# EAGLE board charger (EAGLE 9.6.1)
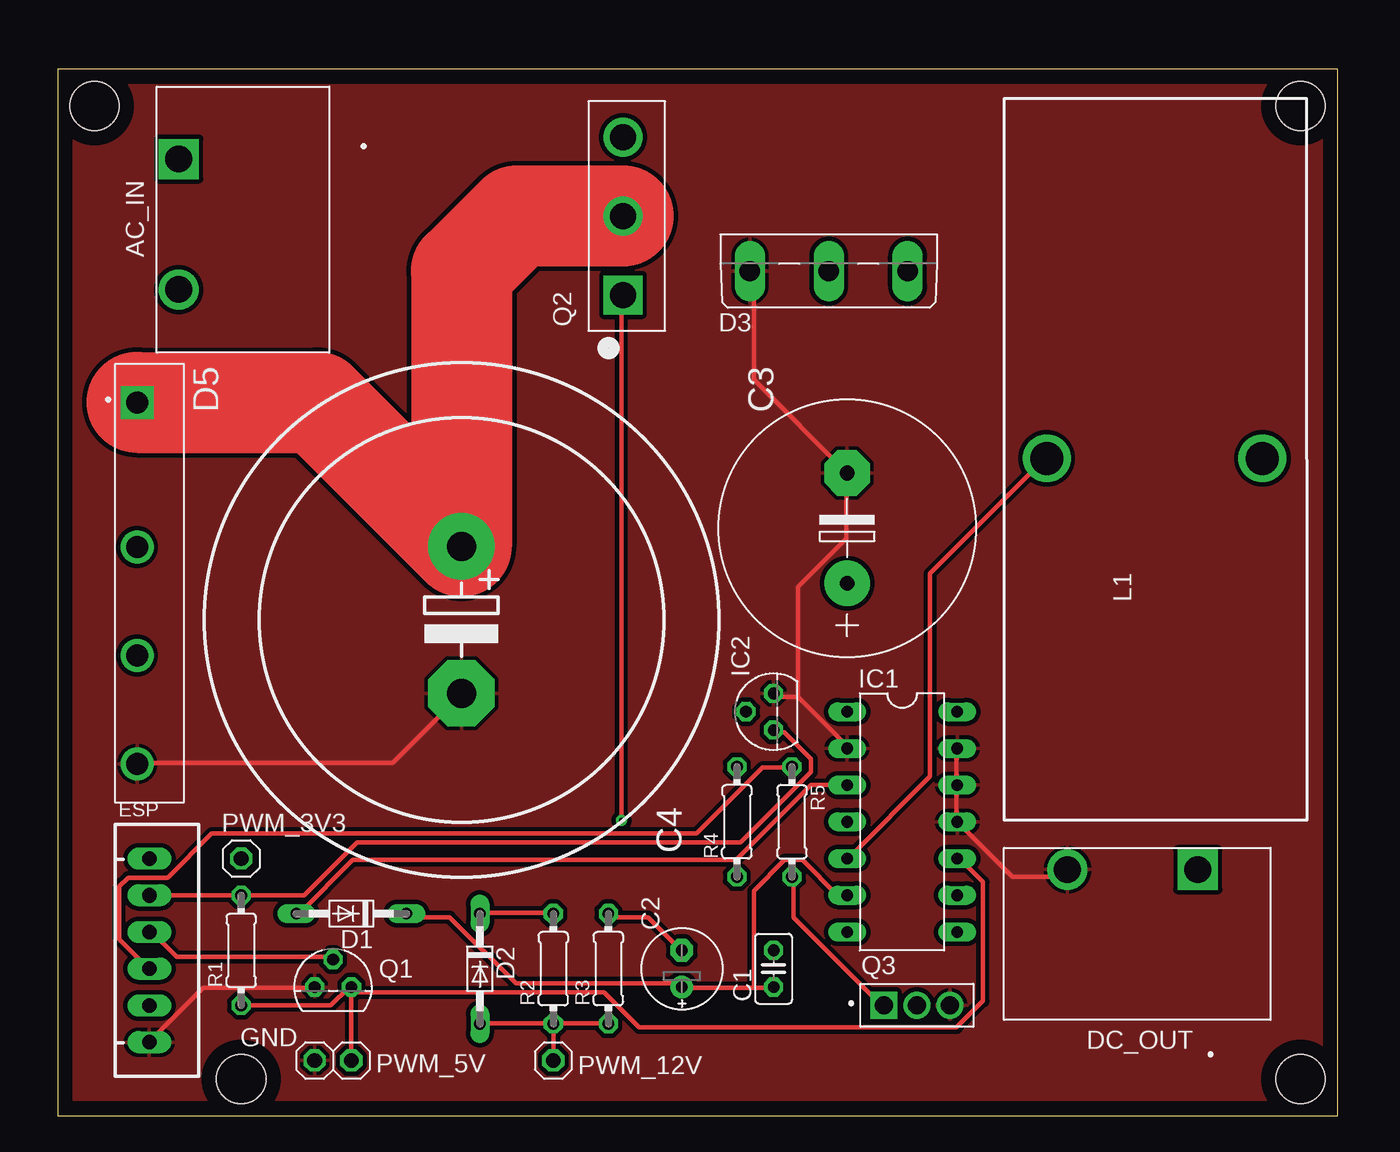
[diagram p0: board, top side]
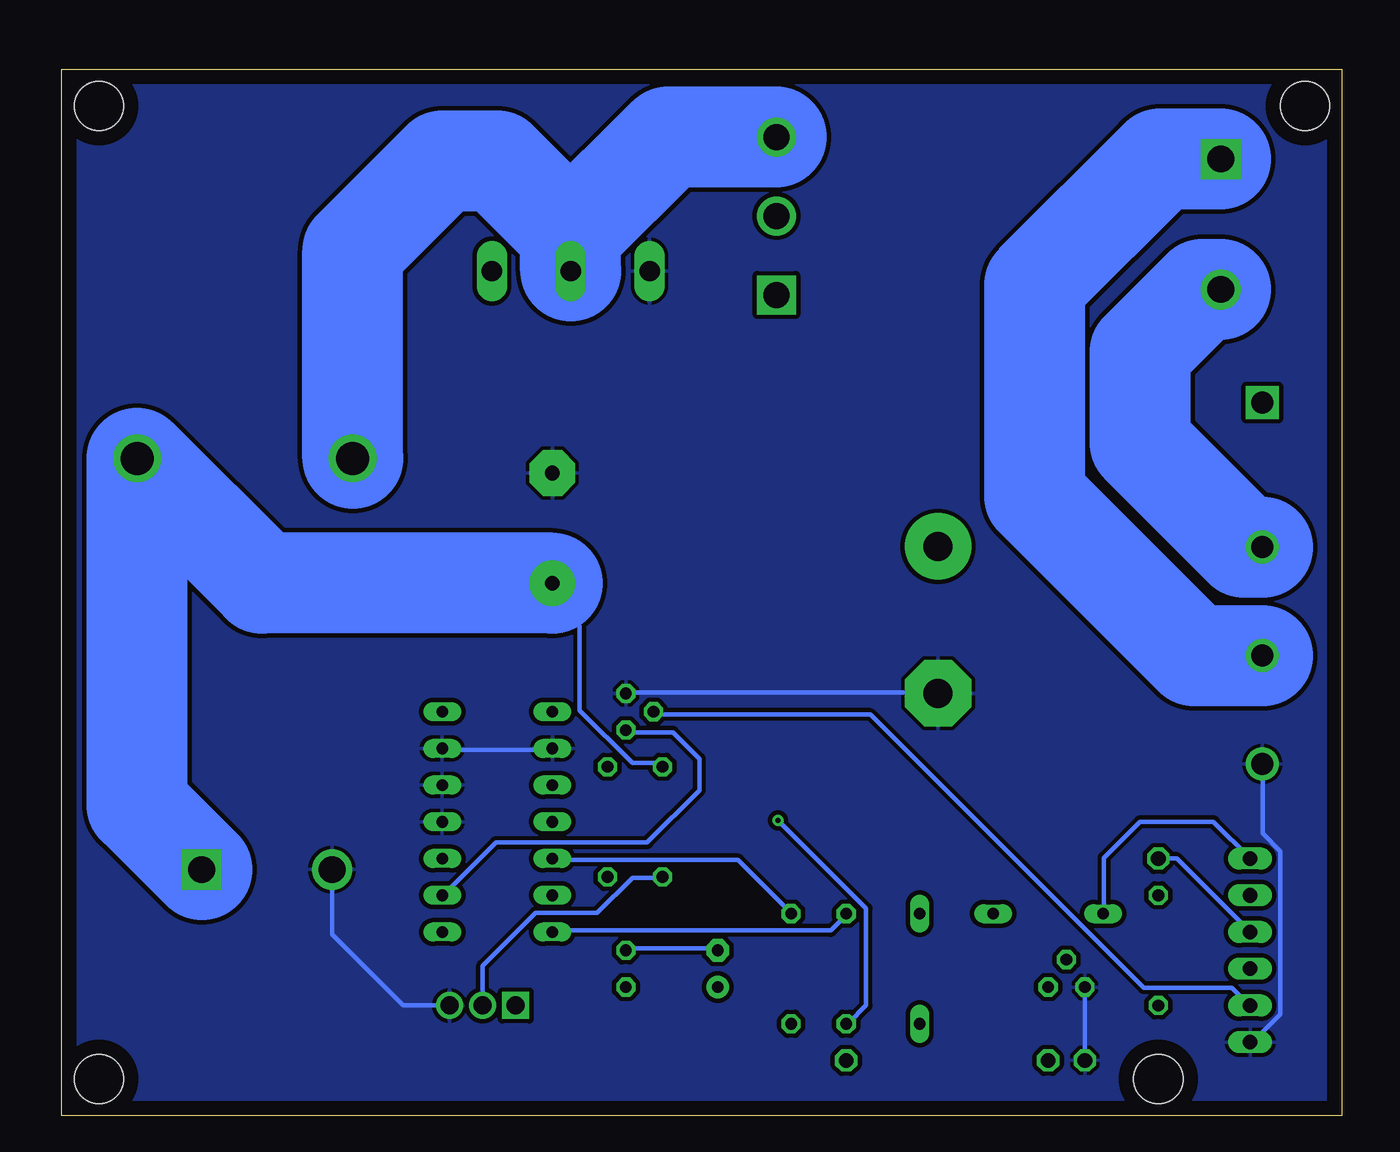
[diagram p1: board, bottom side, seen from below]

Size 88.57 x 72.38 mm. Coordinates in mm from the lower left corner, seen from the top.
Outline: 0,0 88.57,0 88.57,72.38 0,72.38 0,0
Copper layers (1*16): Top 0.035mm / dielectric 1.5mm / Bottom 0.035mm
Design rules "default *": minimum track width 12mil, minimum drill 0.35mm, track to track 12mil, track to pad 12mil, pad to pad 12mil, via to via 12mil, smd to smd 12mil, copper to edge 40mil, drill to drill 6mil, minimum pad ring 10mil, minimum via ring 8mil, stop-mask expansion 4mil, vias tented up to drill 0mil, thermal gap 10mil
Holes 3.4 mm at 2.54,69.85 85.98,69.85 12.7,2.54 85.98,2.54

## Footprints (pad centres in the part's own frame; a part is rotated, then mirrored left to right if it is on the bottom)
TE_1977477-2 = drill 1.85 square: 1 -3.241,-5.334 | drill 1.85: 2 5.781,-5.334
C025-025X050 = drill 0.813 octagon: 1 -1.27,0; 2 1.27,0
E2,5-6E = drill 0.813 pad 1.575: + -1.27,0 | drill 0.813 pad 1.575 octagon: - 1.27,0
E7,5-18 = drill 1.016 pad 3.15: + -3.81,0 | drill 1.016 pad 3.15 octagon: - 3.81,0
EB35D = drill 2.007 pad 4.597: + -5.08,0 | drill 2.007 pad 4.597 octagon: - 5.08,0
DO34-7 = drill 0.813 long: A 3.81,0; C -3.81,0
SOT93S = drill 1.397 long: A1 -5.461,-2.54; A2 5.461,-2.54; C 0,-2.54
DIOB_GBJ3510-BP = drill 1.51 pad 2.27 square: 1 -12.5,-0.85 | drill 1.51 pad 2.27: 2 -2.5,-0.85; 3 5,-0.85; 4 12.5,-0.85
JST-XH-06-PACKAGE-LONG-PAD = drill 1.016 long: 1 -6.35,0; 2 -3.81,0; 3 -1.27,0; 4 1.27,0; 5 3.81,0; 6 6.35,0
1X01 = drill 1.016 octagon: 1 0,0
DIL14 = drill 0.813 long: 1 -7.62,-3.81; 2 -5.08,-3.81; 3 -2.54,-3.81; 4 0,-3.81; 5 2.54,-3.81; 6 5.08,-3.81; 7 7.62,-3.81; 8 7.62,3.81; 9 5.08,3.81; 10 2.54,3.81; 11 0,3.81; 12 -2.54,3.81; 13 -5.08,3.81; 14 -7.62,3.81
TO92 = drill 0.813 octagon: 1 -1.27,0; 2 0,1.905; 3 1.27,0
TJ7-U1 = drill 2.286: 1 -6.503,4.826; 2 8.408,4.826
TO247AC = drill 1.79 pad 2.69 square: 1 -5.46,0.255 | drill 1.79 pad 2.69: 2 0,0.255; 3 5.46,0.255
TO229P780X300X1364-3 = drill 1.25 square: 1 0,0 | drill 1.25: 2 2.29,0; 3 4.58,0
0204/7 = drill 0.813 octagon: 1 -3.81,0; 2 3.81,0

## Placement (x,y rotation side)
AC_IN  1977477-2  [TE_1977477-2]  13.72,62.93 270 top
C1  100nF  [C025-025X050]  49.53,10.16 90 top
C2  22uF  [E2,5-6E]  43.18,10.16 90 top
C3  150uF  [E7,5-18]  54.61,40.64 90 top
C4  470uF  [EB35D]  27.94,34.29 270 top
D1  UF4007  [DO34-7]  20.32,13.97 180 top
D2  UF4007  [DO34-7]  29.21,10.16 270 top
D3  PBYR3035  [SOT93S]  53.34,60.96 0 top
D5  GBJ3510-BP  [DIOB_GBJ3510-BP]  6.35,36.83 270 top
DC_OUT  1977477-2  [TE_1977477-2]  75.63,11.68 180 top
ESP  JST-XH-06-PIN-LONG-PAD  [JST-XH-06-PACKAGE-LONG-PAD]  6.35,11.43 270 top
GND  [1X01]  17.78,3.81 0 top
IC1  IR2110D  [DIL14]  58.42,20.32 270 top
IC2  LM35CZ  [TO92]  49.53,27.94 90 top
L1  1mH  [TJ7-U1]  74.93,40.64 0 top
PWM_3V3  [1X01]  12.7,17.78 0 top
PWM_5V  [1X01]  20.32,3.81 0 top
PWM_12V  [1X01]  34.29,3.81 0 top
Q1  2N7000  [TO92]  19.05,8.89 0 top
Q2  IRFP240  [TO247AC]  39.37,62.23 90 top
Q3  MJE13003G  [TO229P780X300X1364-3]  57.15,7.62 0 top
R1  10k  [0204/7]  12.7,11.43 90 top
R2  10  [0204/7]  34.29,10.16 90 top
R3  1k  [0204/7]  38.1,10.16 90 top
R4  68k  [0204/7]  46.99,20.32 90 top
R5  2.7k  [0204/7]  50.8,20.32 270 top

## Library data of the parts
AC_IN DC_OUT = terminal_block_TA; AVAILABILITY: In Stock; COMMENT: 1977477-2; DESCRIPTION: Conn Barrier Strip 2 POS 8.25mm Solder ST Thru-Hole 15A/Contact Carton; MF: TE Connectivity; MP: 1977477-2; PACKAGE: None; PRICE: None; PURCHASE-URL: https://pricing.snapeda.com/search/part/1977477-2/?ref=eda
C1-C4 = rcl; SPICEPREFIX: C
D1-D3 = diode
D5 = GBJ3510-BP; AVAILABILITY: In Stock; DESCRIPTION: Bridge Rectifier Single Phase Standard 1 kV Through Hole GBJ; MF: Micro Commercial; MP: GBJ3510-BP; PACKAGE: SIP-4 Micro Commercial Co; PRICE: None; PURCHASE-URL: https://pricing.snapeda.com/search/part/GBJ3510-BP/?ref=eda
ESP = Rembrandt Electronics - JST XH Connectors v1-0
GND PWM_3V3 PWM_5V PWM_12V = pinhead
IC1 = irs
IC2 = lm35
L1 = custom_inductor; SPICEPREFIX: L
Q1 = 2N7000; AVAILABILITY: In Stock; DESCRIPTION: N-Channel 60V 350mA (Tc) 1W (Tc) Through Hole TO-92-3; MF: STMicroelectronics; MP: 2N7000; PACKAGE: E-PKG AXIAL-LEADED-2 ON Semiconductor; PRICE: None
Q2 = IRFP240(TO-247); AVAILABILITY: In Stock; DESCRIPTION: N-Channel 200 V 20A (Tc) 150W (Tc) Through Hole TO-247AC; MF: Vishay Siliconix; MP: IRFP240; PACKAGE: TO-247 Vishay Siliconix; PRICE: None
Q3 = MJE13003G; AVAILABILITY: Not in stock; DESCRIPTION: Bipolar (BJT) Transistor NPN 400 V 1.5 A 10MHz 1.4 W Through Hole TO-126; MF: ON Semiconductor; MP: MJE13003G; PACKAGE: TO-126 ON Semiconductor; PRICE: None
R1-R5 = rcl; SPICEPREFIX: R

## Nets
5V: ESP.2 IC1.9 IC2.1 R1.2
12V: D1.A ESP.1 IC1.3
AC_1: AC_IN.2 D5.2
AC_2: AC_IN.1 D5.3
GND: C3.- C4.- D3.A1 D5.4 DC_OUT.2 ESP.6 GND.1 IC1.2 IC1.11 IC1.12 IC1.13 IC2.3 Q1.1 Q3.3
HVDC: C4.+ D5.1 Q2.2
N$2: D2.C IC1.7 R2.2
N$3: Q3.2 R4.1
N$5: Q3.1 R5.2
NMOS_SOURCE: C1.2 C2.- D3.C IC1.5 L1.1 Q2.3 R3.2
PWM_5V: IC1.10 PWM_5V.1 Q1.3 R1.1
PWM_12V: D2.A PWM_12V.1 Q2.1 R2.1 R3.1
PWM_SW1: ESP.3 PWM_3V3.1 Q1.2
PWM_SW2: ESP.4 R5.1
TEMP: ESP.5 IC2.2
V_OUT: C3.+ DC_OUT.1 L1.2 R4.2
VB: C1.1 C2.+ D1.C IC1.6

## Tracks (layer width: path | path; a pad name or v marks a point on that pad's centre or on a via)
5V
  Top 0.305: ESP.2 R1.2 17.07,15.24 20.73,18.9 47.24,18.9 52.12,23.77 52.12,24.69 50.29,26.52 49.68,26.52 IC2.1
  Bottom 0.305: IC2.1 49.38,26.52 46.28,26.52 44.45,24.69 44.45,22.5 48.06,18.9 58.52,18.9 62.18,15.24 IC1.9
12V
  Top 0.305: IC1.3 52.12,22.86 46.94,17.68 20.42,17.68 16.76,14.02 D1.A
  Bottom 0.305: D1.A 16.46,14.02 16.46,17.83 13.97,20.32 8.89,20.32 ESP.1
AC_1
  Bottom 6.985: AC_IN.2 9.65,57.15 13.97,52.83 13.97,46.53 6.77,39.33 D5.2
AC_2
  Bottom 6.985: D5.3 10.24,31.83 21.26,42.85 21.26,57.48 12.57,66.17 AC_IN.1
GND
  Top 0.305: 27.74,29.01 C4.- | 48.16,58.27 D3.A1 48.16,58.22 48.16,50.9 C3.- 54.56,44.2 54.56,39.93 51.21,36.58 51.21,28.96 | 28.04,29.01 C4.- | Q1.1 17.68,8.84 10.06,8.84 6.4,5.18 ESP.6 | 62.18,22.86 62.18,20.42 IC1.11 | 62.18,22.86 62.18,25.3 IC1.13 | 62.18,22.86 IC1.12 | 51.21,28.96 49.68,28.96 IC2.3 | 51.21,28.96 54.56,25.6 IC1.2 | 62.48,20.12 IC1.11 | D5.4 5.79,24.38 23.16,24.38 27.74,28.96 C4.- | IC1.11 66.04,16.51 69.34,16.51 DC_OUT.2
  Bottom 0.305: D5.4 5.49,24.08 5.49,19.51 4.27,18.29 4.27,7.01 6.1,5.18 ESP.6 | Q3.3 64.92,7.62 69.85,12.55 DC_OUT.2 | IC1.13 62.18,25.3 54.86,25.3 IC1.2 | C4.- 28.04,29.26 49.38,29.26 IC2.3 | Q1.1 GND.1
  pour Top: -2.54,74.93 92.71,74.93 92.71,-2.54 -3.81,-2.54 -3.81,73.66
  pour Bottom: -2.54,73.66 88.9,73.66 90.17,72.39 90.17,-1.27 -1.27,-1.27 -2.54,0
HVDC
  Top 6.985: Q2.2 31.75,62.23 27.94,58.42 C4.+ 17.98,49.33 D5.1
N$2
  Top 0.305: D2.C 29.26,14.02 34.14,14.02 R2.2
  Bottom 0.305: IC1.7 54.56,12.8 35.36,12.8 34.44,13.72 R2.2
N$3
  Bottom 0.305: R4.1 47.24,16.46 49.07,16.46 51.51,14.02 55.78,14.02 59.44,10.36 Q3.2
N$5
  Top 0.305: R5.2 50.9,16.46 50.9,13.72 57,7.62 Q3.1
NMOS_SOURCE
  Top 0.305: 68.28,45.47 L1.1 68.28,45.41 60.35,37.49 60.35,23.47 54.86,17.98 IC1.5 | R3.2 38.1,13.72 40.84,13.72 42.98,11.58 C2.-
  Bottom 0.305: C1.2 49.38,11.58 43.28,11.58 C2.- | IC1.5 54.56,17.68 41.76,17.68 38.1,14.02 R3.2
  Bottom 6.985: Q2.3 46.61,67.69 53.34,60.96 | L1.1 68.43,59.84 62.23,66.04 58.42,66.04 53.34,60.96 | D3.C 53.34,60.96
PWM_5V
  Top 0.305: R1.1 18.9,7.62 20.12,8.84 Q1.3 | IC1.10 62.48,17.68 64.01,16.15 64.01,7.92 62.18,6.1 40.23,6.1 37.8,8.53 20.73,8.53 20.42,8.84 Q1.3 | Q1.3 PWM_5V.1
PWM_12V  (via drill 0.35)
  Top 0.305: D2.A 29.26,6.4 34.14,6.4 R2.1 | R3.1 38.1,6.4 34.44,6.4 R2.1 | v39.01,20.42 39.01,56.69 Q2.1 | R2.1 PWM_12V.1
  Bottom 0.305: 39.01,56.49 Q2.1 | v39.01,20.42 32.92,14.33 32.92,7.62 34.14,6.4 R2.1
PWM_SW1
  Top 0.305: Q1.2 18.9,10.97 8.23,10.97 6.4,12.8 ESP.3
  Bottom 0.305: ESP.3 11.43,17.78 PWM_3V3.1
PWM_SW2
  Top 0.305: R5.1 50.6,24.08 48.77,24.08 44.2,19.51 10.67,19.51 7.62,16.46 4.88,16.46 4.27,15.85 4.27,12.19 6.1,10.36 ESP.4
TEMP
  Bottom 0.305: IC2.2 47.55,27.74 32.61,27.74 13.72,8.84 7.62,8.84 6.4,7.62 ESP.5
V_OUT
  Bottom 0.305: C3.+ 52.73,33.88 52.73,28.04 49.07,24.38 47.24,24.38 R4.2
  Bottom 6.985: C3.+ 74.7,36.83 L1.2 83.34,21.48 DC_OUT.1
VB
  Top 0.305: 48.16,8.84 43.28,8.84 C2.+ 42.98,9.14 31.7,9.14 27.13,13.72 24.38,13.72 D1.C | 48.16,8.84 49.38,8.84 C1.1 | IC1.6 53.95,15.24 51.51,17.68 50.29,17.68 48.16,15.54 48.16,8.84